# EAGLE board ESP_Module (EAGLE 9.2.0)
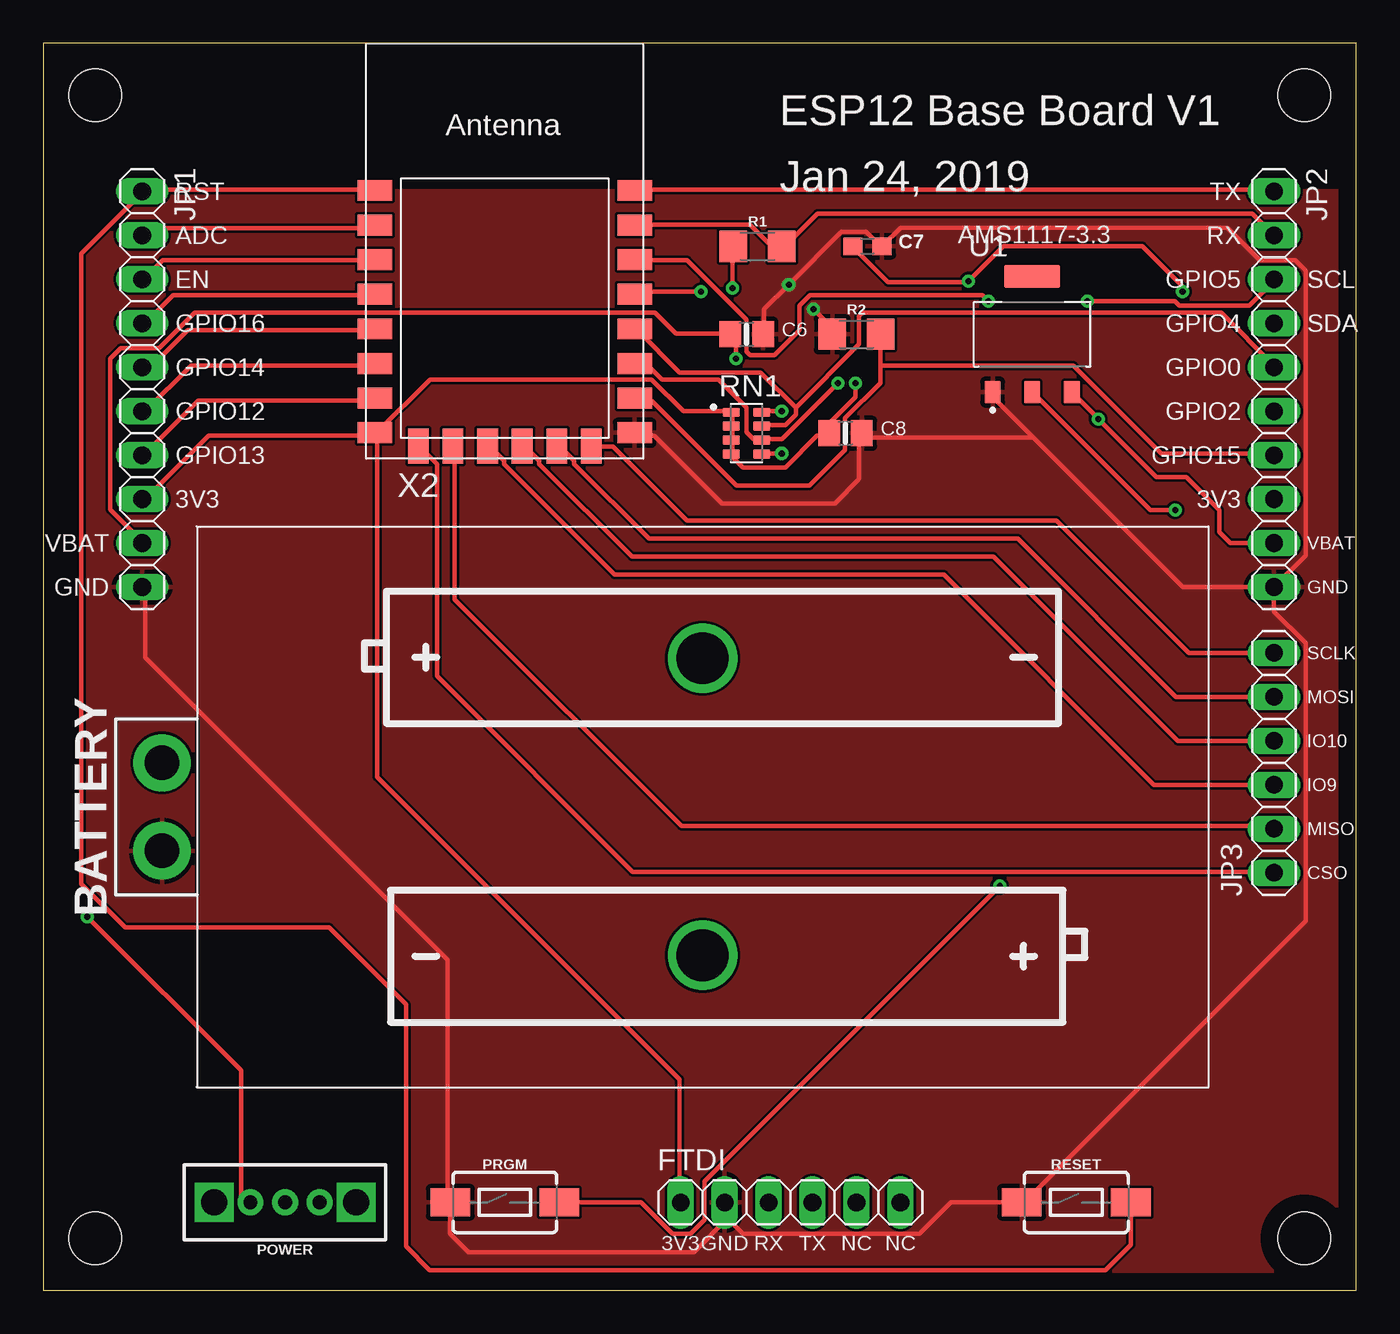
[diagram p0: board, top side]
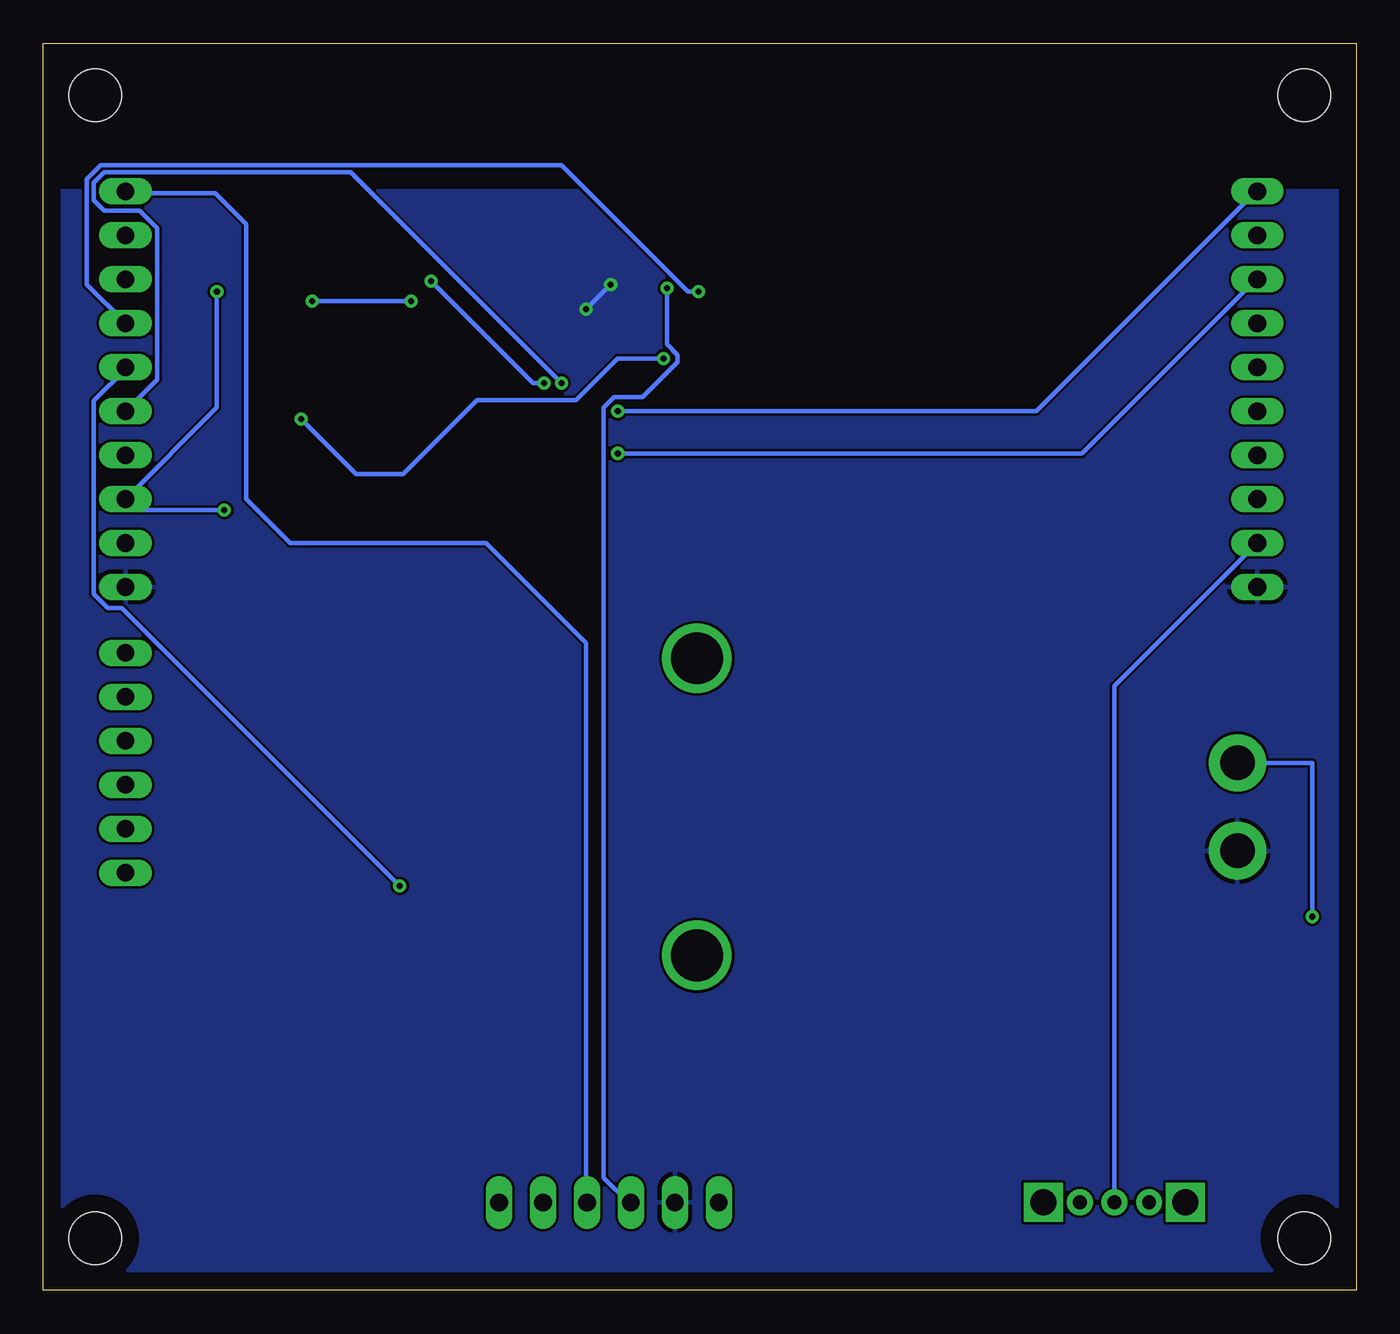
[diagram p1: board, bottom side, seen from below]

Size 75.87 x 72.06 mm. Coordinates in mm from the lower left corner, seen from the top.
Outline: 0,0 75.87,0 75.87,72.06 0,72.06 0,0
Copper layers (1*16): Top 0.035mm / dielectric 1.5mm / Bottom 0.035mm
Design rules "default *": minimum track width 10mil, minimum drill 0.35mm, track to track 6mil, track to pad 6mil, pad to pad 6mil, via to via 6mil, smd to smd 6mil, copper to edge 40mil, drill to drill 6mil, minimum pad ring 10mil, minimum via ring 8mil, stop-mask expansion 4mil, vias tented up to drill 0mil, thermal gap 10mil
Holes 3 mm at 3,3 72.87,69.06 3,69.06 72.87,3

## Footprints (pad centres in the part's own frame; a part is rotated, then mirrored left to right if it is on the bottom)
BATTERY-AA-KIT = drill 2 pad 3.302: GND -31.242,-2.54; PWR -31.242,2.54 | drill 2.997 pad 2.54: P$1 0,8.585; P$2 0,-8.585
0805-NO = smd 1.24 x 1.5: 1 -0.95,0; 2 0.95,0
0603-NO = smd 1.1 x 1: 1 -0.85,0; 2 0.85,0
1X06 = drill 1.016 long: 1 -6.35,0; 2 -3.81,0; 3 -1.27,0; 4 1.27,0; 5 3.81,0; 6 6.35,0
1X10 = drill 1.016 long: 1 -11.43,0; 2 -8.89,0; 3 -6.35,0; 4 -3.81,0; 5 -1.27,0; 6 1.27,0; 7 3.81,0; 8 6.35,0; 9 8.89,0; 10 11.43,0
SWITCH_SPDT_PTH_11.6X4.0MM = drill 0.8 pad 1.5: 1 0,2; 2 0,0; 3 0,-2 | drill 1.5 pad 1.8 square: P$1 0,-4.1; P$2 0,4.1
TACTILE_SWITCH_SMD_6.0X3.5MM = smd 2.3 x 1.6: 1 -3.15,0; 2 3.15,0
1206 = smd 1.6 x 1.8: 1 -1.4,0; 2 1.4,0
RESCAF80P320X160X60-8N = smd 0.97 x 0.53: 1 -0.875,1.2; 2 -0.875,0.4; 3 -0.875,-0.4; 4 -0.875,-1.2; 5 0.875,-1.2; 6 0.875,-0.4; 7 0.875,0.4; 8 0.875,1.2
SOT229P700X180-4N = smd 0.93 x 1.31: 1 -2.29,-3.345; 2 0,-3.345; 3 2.29,-3.345 | smd 3.24 x 1.31: 4 0,3.345
ESP-12E = smd 2 x 1.2: 1 -7.5,5.77; 2 -7.5,3.77; 3 -7.5,1.77; 4 -7.5,-0.23; 5 -7.5,-2.23; 6 -7.5,-4.23; 7 -7.5,-6.23; 8 -7.5,-8.23; 9 7.5,-8.23; 10 7.5,-6.23; 11 7.5,-4.23; 12 7.5,-2.23; 13 7.5,-0.23; 14 7.5,1.77; 15 7.5,3.77; 16 7.5,5.77 | smd 1.2 x 2: 17 -5,-9; 18 -3,-9; 19 -1,-9; 20 1,-9; 21 3,-9; 22 5,-9

## Placement (x,y rotation side)
BATTERY  BATTERY  [BATTERY-AA-KIT]  38.1,27.94 0 top
C6  10µF  [0805-NO]  40.64,55.24 0 top
C7  1uF  [0603-NO]  47.62,60.33 0 top
C8  10µF  [0805-NO]  46.35,49.53 0 top
FTDI  [1X06]  43.18,5.08 0 top
JP1  [1X10]  5.71,52.07 270 top
JP2  [1X10]  71.12,52.07 270 top
JP3  [1X06]  71.12,30.48 90 top
POWER  SWITCH_SPDT_SLIDE  [SWITCH_SPDT_PTH_11.6X4.0MM]  13.97,5.08 90 top
PRGM  PUSHBUTTON  [TACTILE_SWITCH_SMD_6.0X3.5MM]  26.67,5.08 0 top
R1  1K  [1206]  41.27,60.33 0 top
R2  4.7K  [1206]  46.99,55.24 0 top
RESET  PUSHBUTTON  [TACTILE_SWITCH_SMD_6.0X3.5MM]  59.69,5.08 0 top
RN1  10K  [RESCAF80P320X160X60-8N]  40.64,49.53 0 top
U1  AMS1117-3.3  [SOT229P700X180-4N]  57.15,55.24 0 top
X2  ESP-12  [ESP-12E]  26.67,57.78 0 top

## Library data of the parts
BATTERY POWER PRGM RESET = AutoPark
C6-C8 X2 = microbuilder
FTDI JP1-JP3 = pinhead
R1 R2 = SparkFun-Resistors
RN1 = AutoPark; AVAILABILITY: Unavailable; DESCRIPTION: Res Thick Film Array 75 Ohm 5% 0.25W_1/4W_ ?200ppm/C ISOL Molded 8-Pin 1206_4 X 0603_ Convex SMD T/R; MF: Bourns; MP: CAY16-750J4LF; PACKAGE: 1206 Bourns; PRICE: None
U1 = AutoPark; AVAILABILITY: Unavailable; DESCRIPTION: Sot223/Pkg 1-Amp 3.3-Volt Low Drop Out Voltage Regulatator; MF: Advanced Monolithic Systems; MP: AMS1117-3.3; PACKAGE: None; PRICE: None

## Nets
3.3V: C7.1 C8.1 FTDI.1 JP1.8 JP2.8 RN1.1 RN1.2 RN1.3 RN1.4 U1.2 X2.8
ADC: JP1.2 X2.2
CH_PD: JP1.3 RN1.5 X2.3
CSO: JP3.1 X2.17
GND: BATTERY.GND C6.2 C7.2 C8.2 FTDI.2 JP1.10 JP2.10 PRGM.1 R2.1 RESET.1 U1.1 X2.9
GPIO0: JP2.5 PRGM.2 RN1.7 X2.12
GPIO2: JP2.6 RN1.6 X2.11
GPIO4/SDA: JP2.4 X2.13
GPIO5/SCL: JP2.3 X2.14
GPIO12/MISO: JP1.6 X2.6
GPIO13/MOSI: JP1.7 X2.7
GPIO14/SCK: JP1.5 X2.5
GPIO15: JP2.7 R2.2 X2.10
GPIO16: JP1.4 X2.4
IO9: JP3.3 X2.19
IO10: JP3.4 X2.20
MISO: JP3.2 X2.18
MOSI: JP3.5 X2.21
N$1: BATTERY.PWR POWER.1
RESET: JP1.1 RESET.2 RN1.8 X2.1
RXD: JP2.2 R1.2 X2.15
SCLK: JP3.6 X2.22
TXD: FTDI.4 JP2.1 X2.16
USB_RX: FTDI.3 R1.1
VBAT: C6.1 JP1.9 JP2.9 POWER.2 U1.3

## Tracks (layer width: path | path; a pad name or v marks a point on that pad's centre or on a via)
3.3V  (via drill 0.35)
  Top 0.254: C7.1 46.94,60.15 48.82,58.27 53.42,58.27 v53.47,58.32 55.47,60.33 63.5,60.33 65.84,57.99 v65.84,57.71 | X2.8 19.1,49.38 9.55,49.38 5.89,45.72 JP1.8 | FTDI.1 36.78,5.08 36.78,12.19 19.3,29.67 19.3,49.38 X2.8 | X2.8 19.3,49.58 22.35,52.63 35.15,52.63 36.98,50.8 39.62,50.8 RN1.1 39.83,50.6 39.83,49.99 RN1.2 39.83,49.78 39.83,49.17 RN1.3 39.83,48.97 39.83,48.36 RN1.4 39.83,48.16 40.44,47.55 42.88,47.55 44.7,49.38 45.31,49.38 C8.1 45.52,49.58 45.52,50.19 46.94,51.61 v46.94,52.43 | U1.2 63.97,45.09 v65.41,45.09
  Bottom 0.254: v65.84,57.71 65.84,51 JP2.8 70.48,45.09 v65.41,45.09 | v53.47,58.32 47.57,52.43 v46.94,52.43
ADC
  Top 0.254: X2.2 19.1,61.37 6.3,61.37 5.89,60.96 JP1.2
CH_PD  (via drill 0.35)
  Top 0.254: v42.67,48.36 41.66,48.36 RN1.5 | X2.3 19.1,59.54 6.91,59.54 5.89,58.52 JP1.3
  Bottom 0.254: v42.67,48.36 15.85,48.36 5.89,58.32 JP1.3
CSO
  Top 0.254: X2.17 21.74,48.77 22.76,47.75 22.76,35.48 34.06,24.18 71.12,24.18 JP3.1
GND  (via drill 0.35)
  Top 0.254: C6.2 41.66,55.27 41.66,56.69 v43.08,58.12 46.13,61.16 47.55,61.16 48.36,60.35 C7.2 49.57,61.42 68.43,61.42 70.31,59.54 72.34,59.54 72.95,58.93 72.95,42.47 JP2.10 | v44.5,56.69 45.52,55.68 45.52,55.27 R2.1 | 57.2,49.28 47.56,49.28 C8.2 47.14,49.38 47.14,46.86 45.74,45.47 39.22,45.47 35.31,49.38 34.34,49.38 X2.9 | JP2.10 65.84,40.64 57.2,49.28 | 57.2,49.28 54.66,51.82 U1.1 | 39.53,4.15 37.59,2.21 24.59,2.21 23.52,3.28 PRGM.1 23.37,5.08 23.37,19.1 5.89,36.58 5.89,40.64 JP1.10 | 39.22,4.47 39.22,5.08 FTDI.2 39.22,4.47 | 39.22,4.47 39.53,4.15 | 39.53,4.15 40.44,3.25 50.62,3.25 52.45,5.08 RESET.1 56.69,5.08 72.95,21.34 72.95,37.39 71.12,39.22 JP2.10
  Bottom 0.254: v43.08,58.12 v44.5,56.69
  pour Top: 0,63.5 76.2,63.5 76.2,62.87 76.2,0 0,0
  pour Bottom: 0,63.5 76.2,63.5 76.2,0 0,0
GPIO0  (via drill 0.35)
  Top 0.254: 43.48,51 43.48,50.6 42.88,49.99 41.66,49.99 RN1.7 | 43.48,51 41.45,53.03 36.78,53.03 34.34,55.47 X2.12 | PRGM.2 34.54,5.08 36.37,3.25 37.39,3.25 38.2,4.06 38.2,6.3 v55.27,23.37 | 43.48,51 47.14,54.66 47.14,56.29 47.35,56.49 68.07,56.49 71.12,53.44 JP2.5
  Bottom 0.254: v55.27,23.37 71.32,39.42 72.14,39.42 72.95,40.23 72.95,51.41 71.12,53.24 JP2.5
GPIO2  (via drill 0.35)
  Top 0.254: X2.11 34.34,53.44 34.95,53.44 35.76,52.63 39.01,52.63 40.64,51 40.64,49.58 41.05,49.17 41.45,49.17 RN1.6 41.66,49.17 42.67,49.17 v45.92,52.43
  Bottom 0.254: JP2.6 69.29,52.63 69.29,61.37 70.31,62.38 72.34,62.38 72.95,62.99 72.95,64.01 72.34,64.62 58.12,64.62 v45.92,52.43
GPIO4/SDA  (via drill 0.35)
  Top 0.254: v38,57.71 34.34,57.71 X2.13
  Bottom 0.254: v38,57.71 38.61,57.71 45.92,65.02 72.54,65.02 73.36,64.21 73.36,58.12 JP2.4
GPIO5/SCL  (via drill 0.35)
  Top 0.254: X2.14 34.34,59.54 37.19,59.54 40.64,56.08 40.64,54.25 40.84,54.05 42.27,54.05 43.69,55.47 43.69,56.9 44.3,57.51 54.25,57.51 v54.61,57.15 | JP2.3 71.12,58.32 69.7,56.9 65.63,56.9 65.38,57.15 v60.33,57.15
  Bottom 0.254: v60.33,57.15 v54.61,57.15
GPIO12/MISO
  Top 0.254: X2.6 19.1,53.44 8.53,53.44 5.89,50.8 JP1.6
GPIO13/MOSI
  Top 0.254: X2.7 19.1,51.41 8.94,51.41 5.89,48.36 JP1.7
GPIO14/SCK
  Top 0.254: X2.5 19.1,55.47 8.33,55.47 6.3,53.44 5.89,53.44 JP1.5
GPIO15
  Top 0.254: 48.36,53.44 48.36,52.43 46.33,50.39 46.33,48.56 44.27,46.51 40.06,46.51 35.15,51.41 34.34,51.41 X2.10 | 48.36,53.44 48.36,55.07 R2.2 | 48.36,53.44 59.54,53.44 64.62,48.36 71.12,48.36 JP2.7
GPIO16
  Top 0.254: X2.4 19.1,57.51 7.52,57.51 5.89,55.88 JP1.4
IO9
  Top 0.254: JP3.3 64.19,29.21 52.05,41.35 33.02,41.35 26.62,47.75 26.62,47.95 25.81,48.77 X2.19
IO10
  Top 0.254: JP3.4 65.56,31.75 54.91,42.39 34.01,42.39 28.65,47.75 28.65,47.95 27.84,48.77 X2.20
MISO
  Top 0.254: X2.18 23.77,48.77 23.77,39.93 36.88,26.82 71.12,26.82 JP3.2
MOSI
  Top 0.254: JP3.5 65.46,34.29 56.31,43.43 35,43.43 30.68,47.75 30.68,47.95 29.87,48.77 X2.21
N$1  (via drill 0.35)
  Top 0.254: v2.54,21.59 11.43,12.7 11.43,5.08 POWER.1
  Bottom 0.254: v2.54,21.59 2.54,30.48 BATTERY.PWR
RESET  (via drill 0.35)
  Top 0.254: v42.67,50.8 41.66,50.8 RN1.8 | X2.1 19.1,63.6 5.89,63.6 JP1.1 5.69,63.4 2.18,59.89 2.18,23.5 4.72,20.95 16.51,20.95 20.95,16.51 20.95,2.54 22.33,1.17 61.37,1.17 62.84,2.64 RESET.2
  Bottom 0.254: v42.67,50.8 18.49,50.8 5.89,63.4 JP1.1
RXD
  Top 0.254: X2.15 34.34,61.57 40.84,61.57 42.06,60.35 42.67,60.35 R1.2 42.88,60.35 44.73,62.2 69.88,62.2 JP2.2
SCLK
  Top 0.254: JP3.6 66.19,36.83 58.55,44.48 37.21,44.48 32.92,48.77 31.7,48.77 X2.22
TXD
  Top 0.254: X2.16 34.34,63.6 71.12,63.6 JP2.1
  Bottom 0.254: FTDI.4 44.5,5.08 44.5,37.39 50.29,43.18 61.59,43.18 64.14,45.72 64.14,61.59 65.94,63.4 70.51,63.4 71.12,63.4 JP2.1
USB_RX  (via drill 0.35)
  Top 0.254: v39.83,57.91 39.83,60.15 R1.1
  Bottom 0.254: v39.83,57.91 39.83,54.66 39.22,54.05 39.22,53.65 41.25,51.61 42.88,51.61 43.48,51 43.48,6.5 42.06,5.08 FTDI.3
VBAT  (via drill 0.35)
  Top 0.254: JP1.9 5.69,43.28 3.86,45.11 3.86,53.85 4.47,54.46 6.71,54.46 8.74,56.49 35.36,56.49 36.58,55.27 39.62,55.27 C6.1 39.83,55.07 40.03,54.86 v40.03,53.85 | U1.3 60.96,50.38 v60.96,50.34 64.31,46.99 66.04,46.99 67.94,45.09 67.94,43.81 68.58,43.18 JP2.9
  Bottom 0.254: JP1.9 13.97,34.92 POWER.2 | v60.96,50.34 57.78,47.17 55.07,47.17 50.8,51.44 45.09,51.44 42.67,53.85 v40.03,53.85

## Text on the board
tPlace: ESP12 Base Board V1 | RST | Jan 24, 2019 | TX | ADC | RX | EN | GPIO5 | SCL | GPIO16 | GPIO4 | SDA | GPIO14 | GPIO0 | GPIO12 | GPIO2 | GPIO13 | GPIO15 | 3V3 | 3V3 | VBAT | VBAT | GND | GND | SCLK | MOSI | IO10 | IO9 | MISO | CSO | 3V3 | GND | RX | TX | NC | NC